# Altium PCB SX1276_e266v02a.PcbDoc
Units mm, origin at the board's own origin, x right, y up, seen from the top; angles counter-clockwise.
Board outline 65 x 36 mm, 4 copper layers (Top Layer, MidLayer1, MidLayer2, Bottom Layer), stack 1.661 mm thick; 101 components, 85 nets, 299 pads, 648 vias.
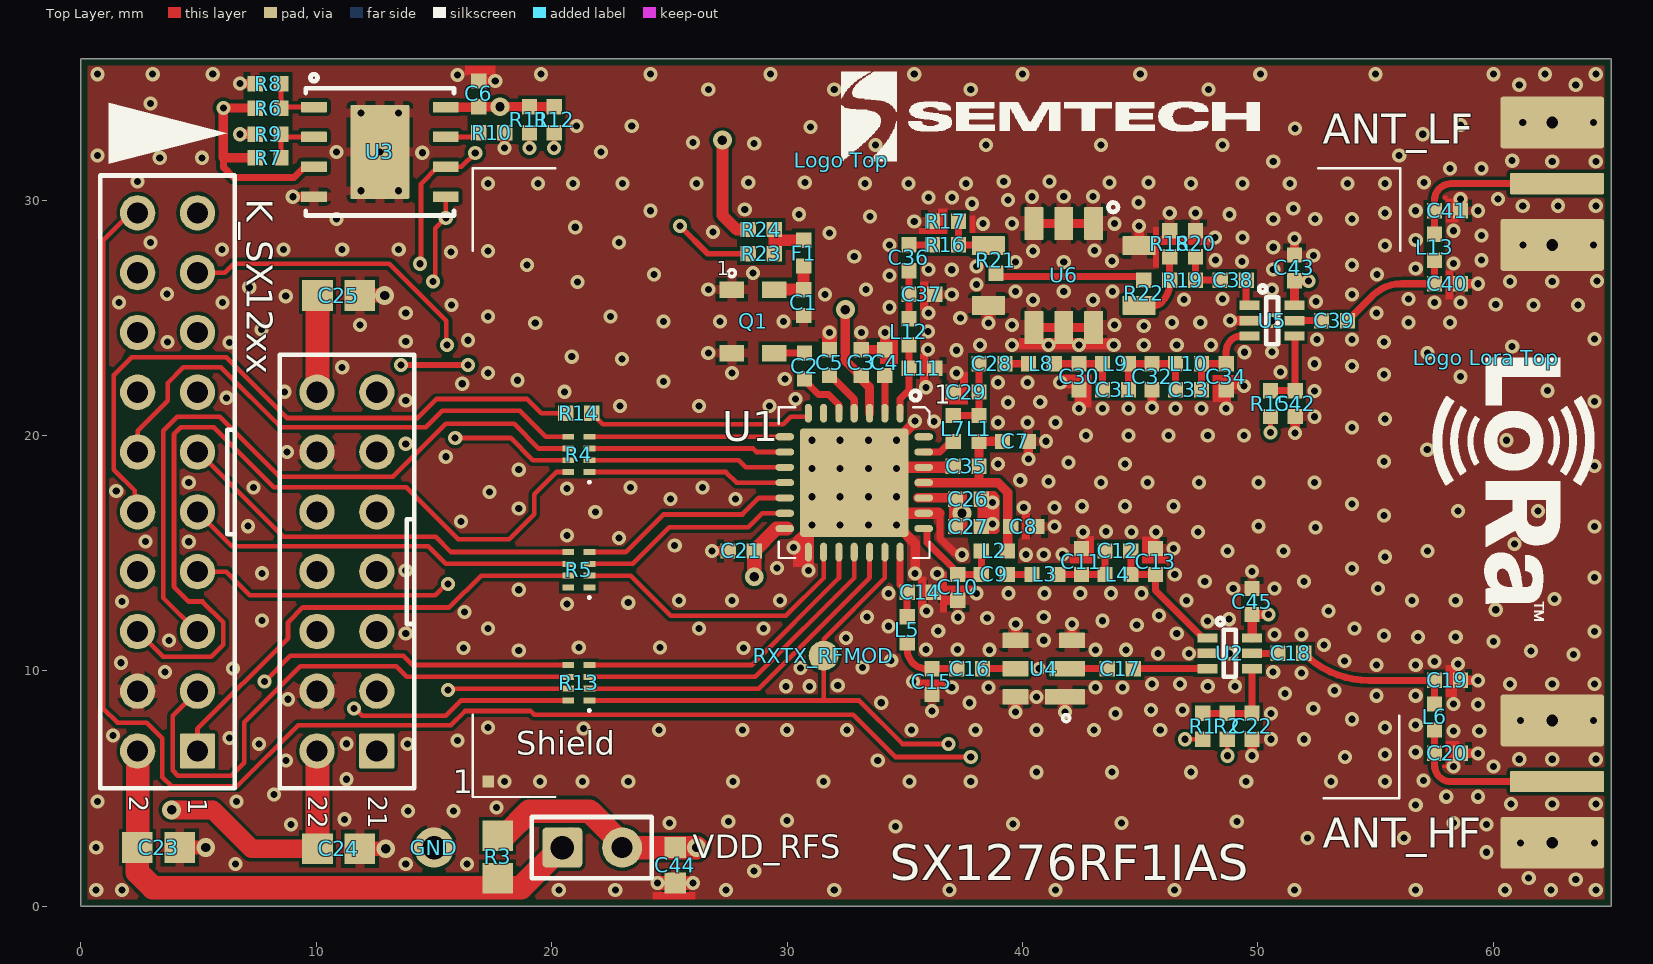
[diagram p0: Top Layer view]
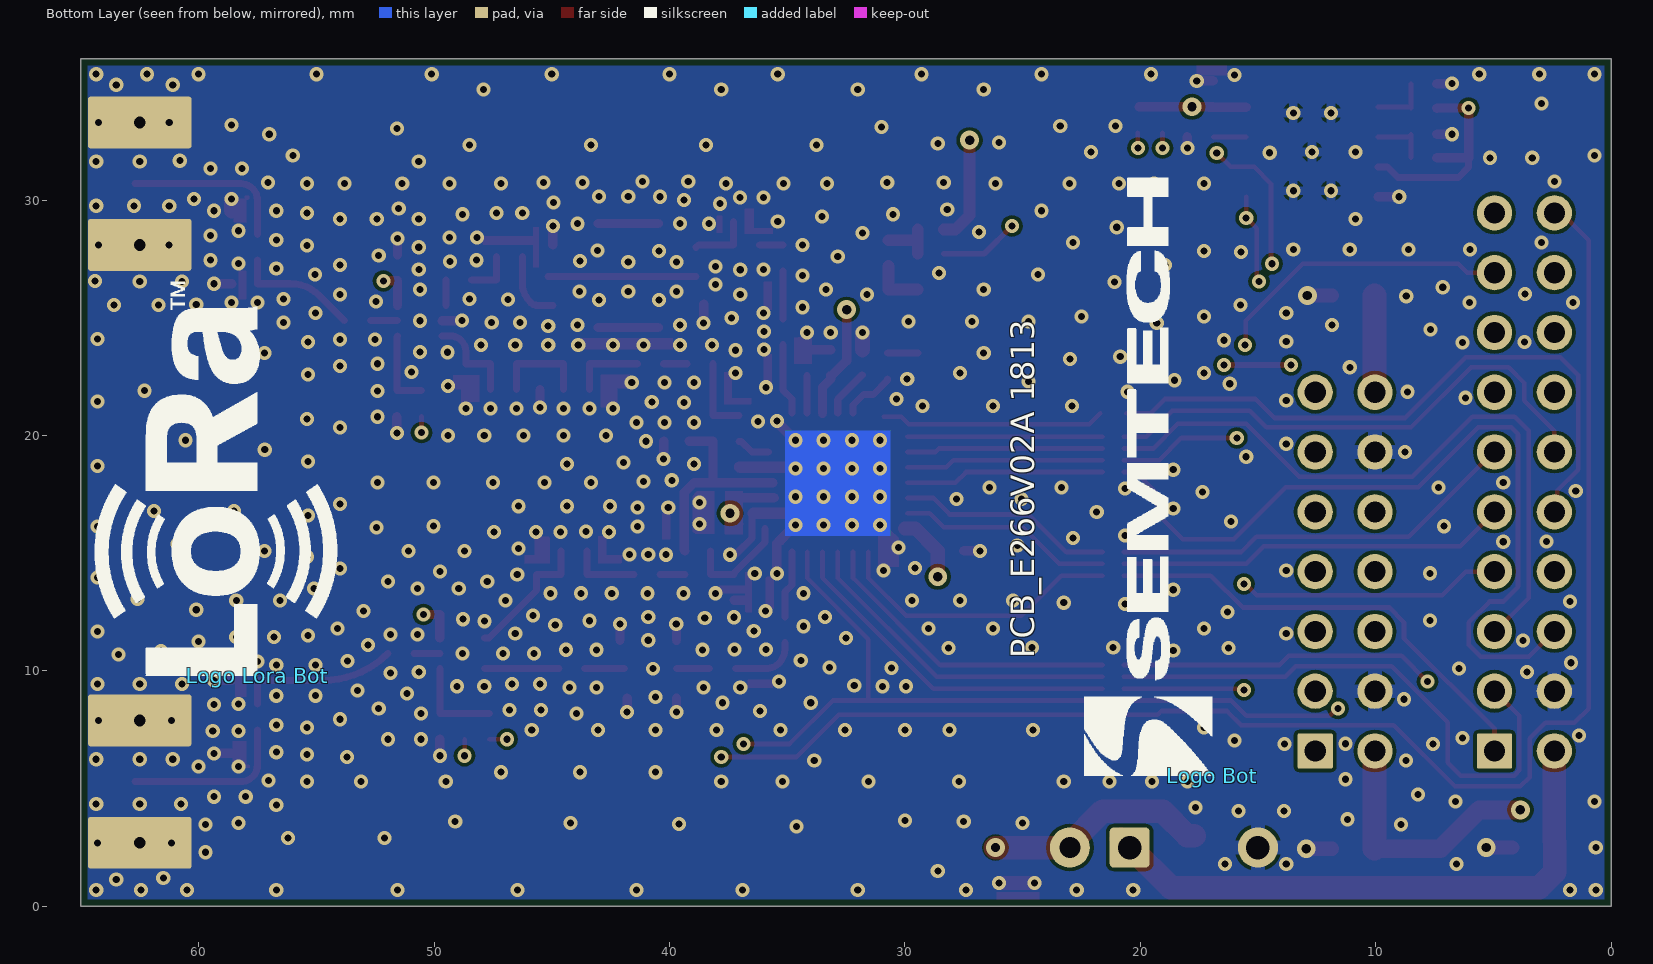
[diagram p1: Bottom Layer view, seen from below]
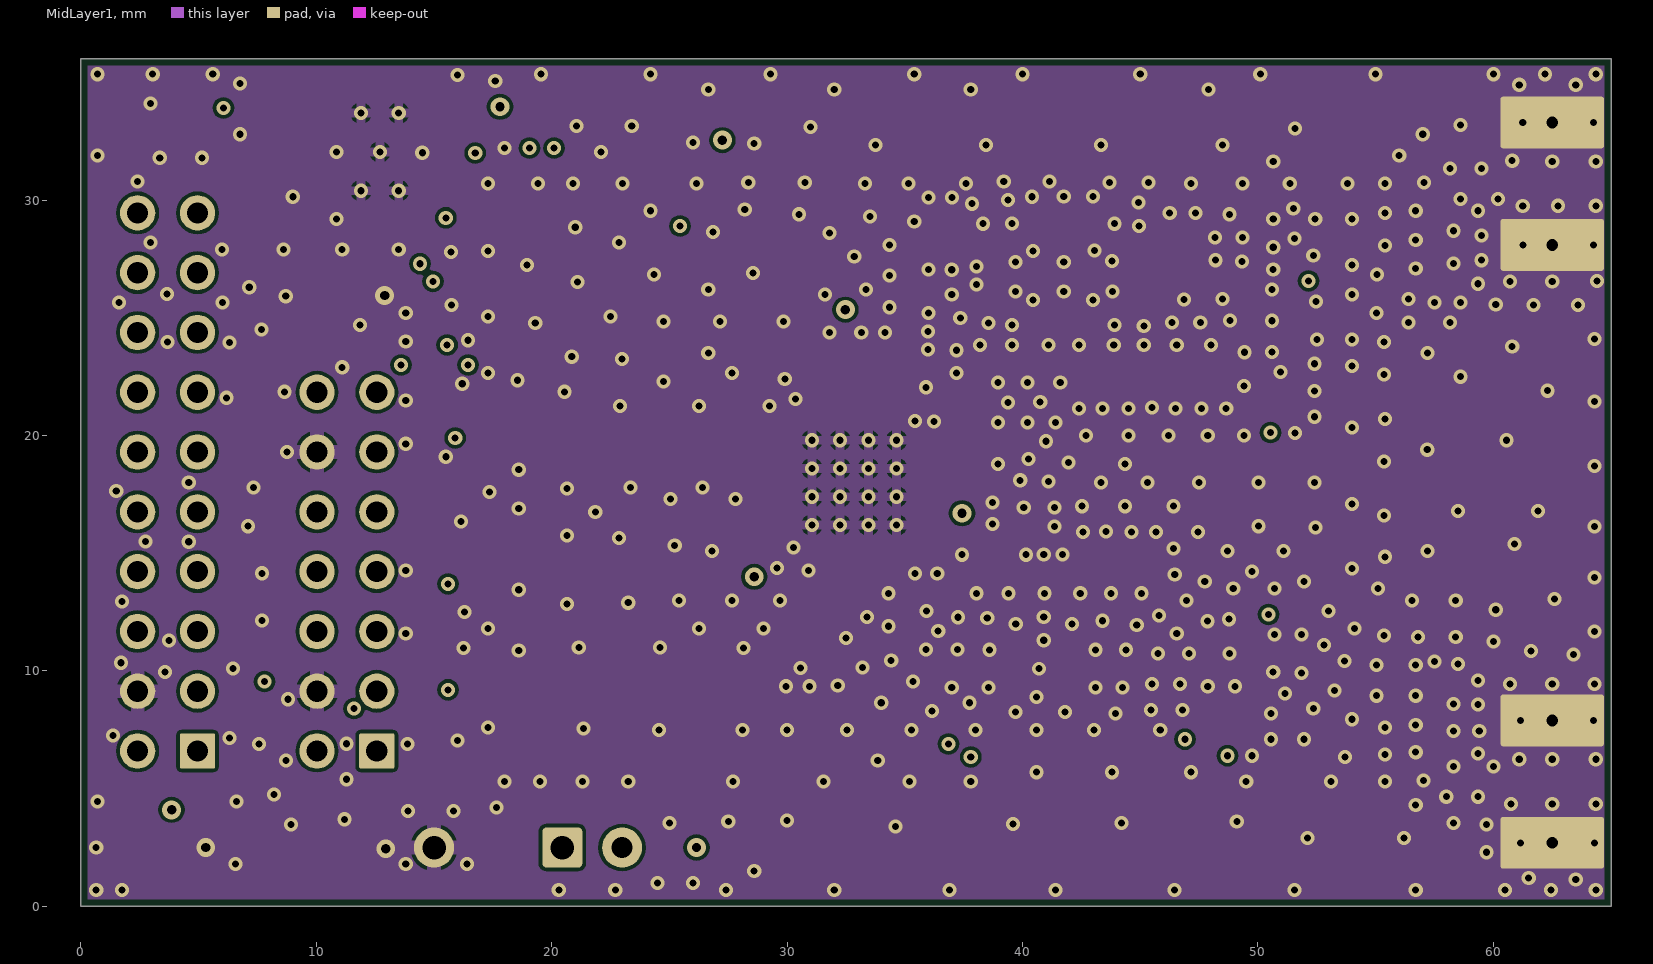
[diagram p2: MidLayer1]
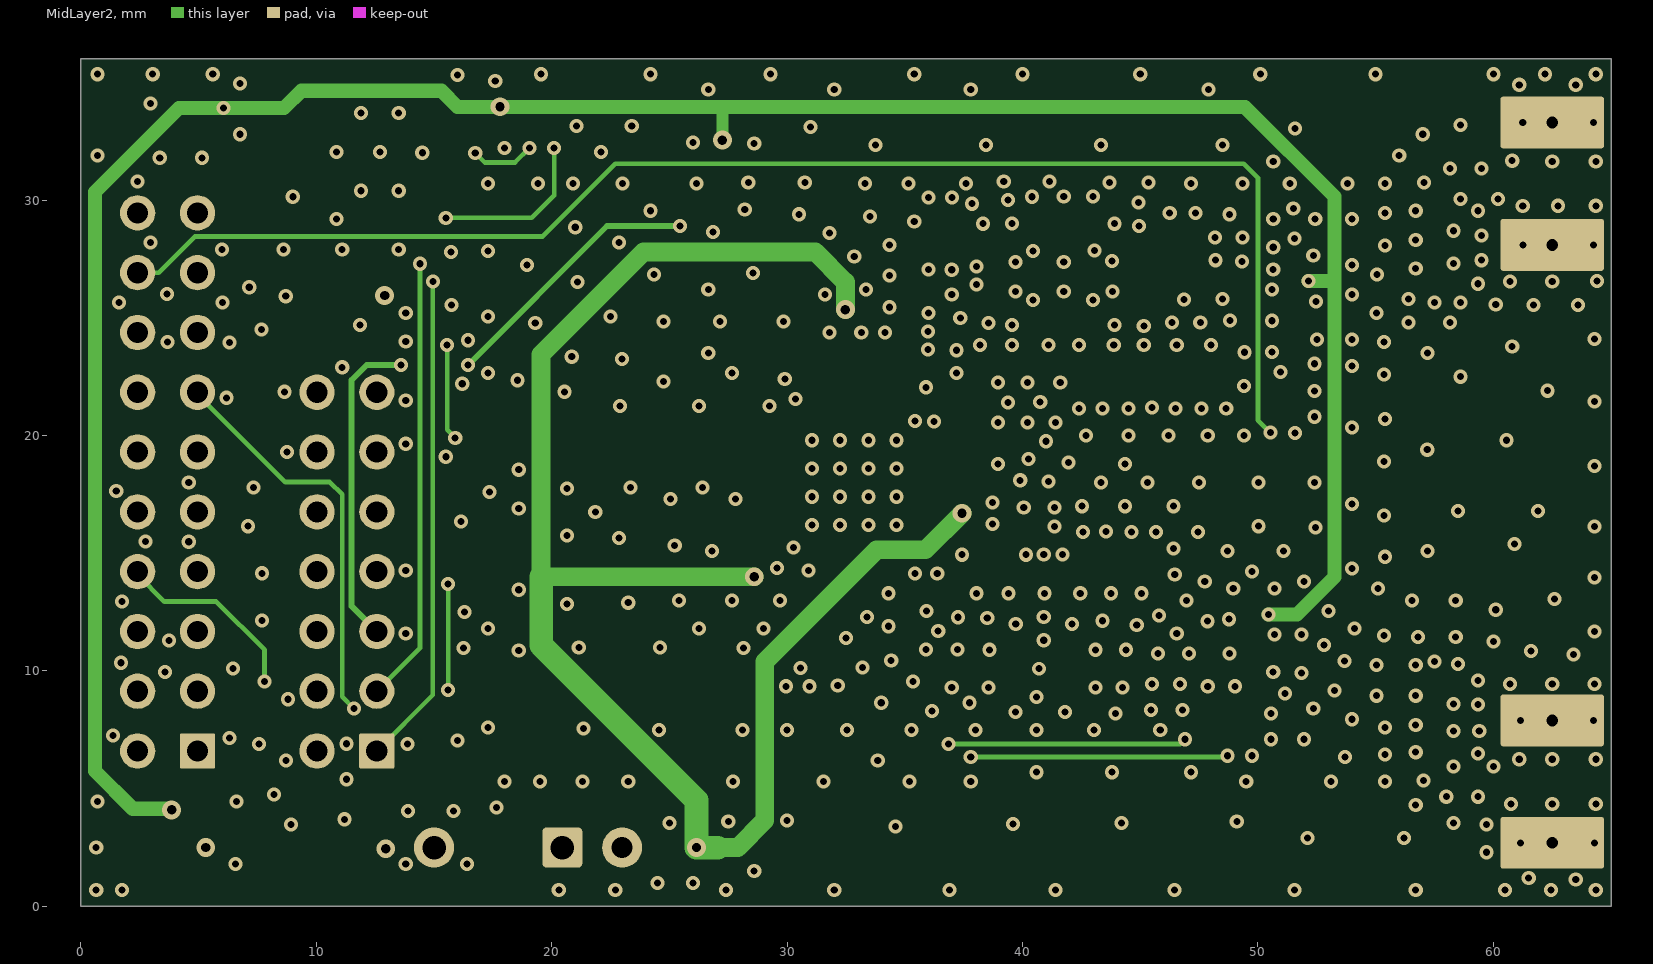
[diagram p3: MidLayer2]

## Layer stack, top to bottom
Top Layer: signal copper 0.035
Dielectric: core 0.2, FR-4, Dk 4.3
MidLayer1: signal copper 0.0356
Dielectric: prepreg 1.12, FR-4, Dk 4.3
MidLayer2: signal copper 0.0356
Dielectric: core 0.2, FR-4, Dk 4.3
Bottom Layer: signal copper 0.035

## Board outline
0,0 0,36 65,36 65,0

## Design rules (kind name [scope] priority, off if disabled: settings)
Clearance Clearance_GND [InNet('GND')] p1: gap=0.15
Clearance [All] p2: gap=0.15
ComponentClearance ComponentClearance_keepout ['SX1276_e266v02a' vs OnLayer('Mechanical 12')] p1: gap=0.25 collisioncheckmode=3 verticalgap=0.3 showdistances=FALSE
ComponentClearance [All] p2: gap=0.25 collisioncheckmode=3 verticalgap=0.3 showdistances=FALSE
HoleSize [All] p1: absolutevalues=TRUE maxlimit=3.6 minlimit=0.25 maxpercent=80.000 minpercent=20.000
HoleToHoleClearance [All] p1: gap=0.25 allowstackedmicrovias=TRUE
MinimumSolderMaskSliver [All] p1: minsoldermaskwidth=0.05
PlaneClearance [All] p1: clearance=0.2
PlaneConnect [All] p1: planeconnectstyle=Direct reliefexpansion=0.508 reliefentries=4 reliefconductorwidth=0.254 reliefairgap=0.254
PolygonConnect "PolygonConnect SAW SMD PACKAGE" [InNet('GND') vs HasFootprint('7.0X5.0MM SMD PACKAGE')   or  HasFootprint('DCC6C_3.0X3.0MM')] p1: connectstyle=Relief reliefconductorwidth=0.65 reliefentries=4 polygonreliefangle="90 Angle"
PolygonConnect "PolygonConnect SMD" [InNet('GND') vs HasFootprint('nd3225da - nd2520da') or HasFootprint('DD10_L') or HasFootprint('MSOP8')  or  HasFootprint('vqfn28_6x6mm') or HasFootprint('SOIC-SN8_L')  or HasFootprint('rlc_1206_smd capa pol') or HasFootprint('rlc_603_smd') or HasFootprint('rlc_402_smd') or HasFootprint('rlc_402_smd diode') or hasFootprint('rlc_805_smd') or HasFootprint('rlc_1210_smd')   or HasFootprint('MiniMold-6') or HasFootprint('DFN8_ 5x6mm') or HasFootprint('SC70-6') or HasFootprint('IT3200C TCXO')] p2: connectstyle=Relief reliefconductorwidth=0.4 reliefentries=4 polygonreliefangle="90 Angle"
PolygonConnect PolygonConnect_comp_diverse [InNet('GND') vs HasFootprint('CD1608-0603') or  HasFootprint('HDR34 Header') or  HasFootprint('BRIDGE_254MM') or  HasFootprint('pin_1mm') or HasFootprint('SMA_END_LAUNCH_JACK_RECEPTACLE')] p3: connectstyle=Relief reliefconductorwidth=0.6 reliefentries=4 polygonreliefangle="90 Angle"
PolygonConnect PolygonConnect_all [All] p4: connectstyle=Direct reliefconductorwidth=0.6 reliefentries=4 polygonreliefangle="90 Angle"
RoomDefinition SX1276_e266v02a [InComponentClass('SX1276_e266v02a')] p1: confinementstyle=ConfineOut formatcopy=TRUE lockcomponents=FALSE outline 73.45,41 73.45,52 83,52 83,41
RoutingVias [All] p1: holewidth=0.3 width=0.6 viastyle="Through Hole" minholewidth=0.25 minwidth=0.5 maxholewidth=0.4 maxwidth=0.8
SilkToSilkClearance [All] p1: silktosilkclearance=0.05
SilkscreenOverComponentPads [All] p1: minsilkscreentomaskgap=0.05
SolderMaskExpansion [All] p1: expansion=0.05
Width "Width GND" [InNet('GND')] p1: maxlimit=3 minlimit=0.2 preferedwidth=0.4
Width Width_VCC [InNet('VDD_RF') or  InNet('VDD_RFS') or  InNet('VCC') or  InNet('VBAT') or InNet('VSUPERCAP') or InNet('VCC_FEM')   or InNet('VCC_PA')] p2: maxlimit=2 minlimit=0.2 preferedwidth=0.8
Width "Width All" [All] p3: maxlimit=2 minlimit=0.15 preferedwidth=0.2
20 further rules are at their usual default settings.

## Components (designator, comment, footprint, x,y, rotation, side; value= is the part's Value field where it differs from the comment)
ANT_HF "SMA" "SMA END LAUNCH JACK RECEPTACLE SHORT" 62.7,5.3 r90 top locked
ANT_LF "SMA" "SMA END LAUNCH JACK RECEPTACLE SHORT" 62.7,30.7 r90 top locked
C1 "Cap" rlc_402_smd 30.7,25.65 r90 top
C2 "Cap" rlc_402_smd 30.738,22.95 r270 top
C3 "Cap" rlc_402_smd 33.15,23.1 r270 top
C4 "Cap" rlc_402_smd 34.15,23.1 r270 top
C5 "Cap" rlc_402_smd 31.8,23.1 r270 top
C6 "Cap" rlc_402_smd 16.9,34.515 r270 top
C7 "Cap" rlc_402_smd 39.7,19.75 r180 top
C8 "Cap" rlc_402_smd 40.05,16.134 r180 top
C9 "Cap" rlc_402_smd 38.8,14.1 r180 top
C10 "Cap" rlc_402_smd 37.25,13.55 r90 top
C11 "Cap" rlc_402_smd 42.5,14.65 r270 top
C12 "Cap" rlc_402_smd 44.05,15.1 r180 top
C13 "Cap" rlc_402_smd 45.65,14.65 r270 top
C14 "Cap" rlc_402_smd 35.65,13.35 r180 top
C15 "Cap" rlc_402_smd 36.15,9.55 r90 top
C16 "Cap" rlc_402_smd 37.75,10.1 r180 top
C17 "Cap" rlc_402_smd 44.15,10.1 r180 top
C18 "Cap" rlc_402_smd 51.4,10.75 r180 top
C19 "Cap" rlc_402_smd 58.05,9.6 r180 top
C20 "Cap" rlc_402_smd 58.05,6.5 r180 top
C21 "Cap" rlc_402_smd 28.05,15.1 r0 top
C22 "Cap" rlc_402_smd 49.75,7.65 r270 top
C23 "Cap" rlc_805_smd 3.299,2.5 r180 top
C24 "Cap" rlc_805_smd 10.949,2.45 r180 top
C25 "Cap" rlc_805_smd 10.949,25.95 r0 top
C26 "Cap" rlc_402_smd 37.7,17.3 r180 top
C27 "Cap" rlc_402_smd 37.7,16.134 r180 top
C28 "Cap" rlc_402_smd 38.7,23.05 r180 top
C29 "Cap" rlc_402_smd 37.6,21.85 r0 top
C30 "Cap" rlc_402_smd 42.4,22.5 r90 top
C31 "Cap" rlc_402_smd 43.95,21.95 r180 top
C32 "Cap" rlc_402_smd 45.5,22.5 r90 top
C33 "Cap" rlc_402_smd 47.05,21.95 r180 top
C34 "Cap" rlc_402_smd 48.65,22.5 r90 top
C35 "Cap" rlc_402_smd 37.6,18.7 r0 top
C36 "Cap" rlc_402_smd 35.175,27.55 r270 top
C37 "Cap" rlc_402_smd 35.725,26 r180 top
C38 "Cap" rlc_402_smd 48.95,26.6 r180 top
C39 "Cap" rlc_402_smd 53.25,24.88 r180 top
C40 "Cap" rlc_402_smd 58.05,26.45 r180 top
C41 "Cap" rlc_402_smd 58.05,29.55 r180 top
C42 "Cap" rlc_402_smd 51.58,21.356 r270 top
C43 "Cap" rlc_402_smd 51.552,27.122 r270 top
C44 "Cap Semi" rlc_603_smd 25.25,1.75 r90 top
C45 "Cap" rlc_402_smd 49.75,12.95 r270 top
F1 "Ferrite beads" rlc_402_smd 30.7,27.75 r270 top
GND "Test Pin" pin_1mm 15.5,3 r0 top
K_SX12xx "SM12xx Header" "HDR34 Header" 4.95,6.6 r90 top locked
L1 "Inductor" rlc_402_smd 38.15,20.3 r90 top
L2 "Inductor" rlc_402_smd 38.8,15.1 r0 top
L3 "Inductor" rlc_402_smd 40.95,14.1 r0 top
L4 "Inductor" rlc_402_smd 44.05,14.1 r0 top
L5 "Inductor" rlc_402_smd 35.1,11.75 r270 top
L6 "Inductor" rlc_402_smd 57.5,8.05 r270 top
L7 "Inductor" rlc_402_smd 37.05,20.3 r90 top
L8 "Inductor" rlc_402_smd 40.8,23.05 r0 top
L9 "Inductor" rlc_402_smd 43.95,23.05 r0 top
L10 "Inductor" rlc_402_smd 47.05,23.05 r0 top
L11 "Inductor" rlc_402_smd 35.725,22.858 r180 top
L12 "Inductor" rlc_402_smd 35.175,24.408 r90 top
L13 "Inductor" rlc_402_smd 57.5,28 r90 top
"Logo Bot" "Logo symbol" logo_semtech_horiz_size3 16.95,5.55 r90 bottom
"Logo Lora Bot" "Logo symbol" "Logo LoRa Size4" 57.5,9.8 r90 bottom
"Logo Lora Top" "Logo symbol" "Logo LoRa Size3" 59.7,23.3 r270 top
"Logo Top" "Logo symbol" logo_semtech_horiz_size2 32.3,31.7 r0 top
Q1 "TCXO" "IT3200C TCXO" 28.55,24.85 r270 top
R1 "Resistor" rlc_402_smd 47.65,7.65 r90 top
R2 "Resistor" rlc_402_smd 48.7,7.65 r270 top
R3 "Resistor" rlc_805_smd 17.7,2.1 r270 top
R4 "EXBN8VxxxJX" EXB28V 21.15,19.2 r90 top
R5 "EXBN8VxxxJX" EXB28V 21.15,14.3 r90 top
R6 "Resistor" rlc_402_smd 7.95,33.9 r180 top
R7 "Resistor" rlc_402_smd 7.95,31.8 r180 top
R8 "Resistor" rlc_402_smd 7.95,34.95 r0 top
R9 "Resistor" rlc_402_smd 7.95,32.8 r0 top
R10 "Resistor" rlc_402_smd 17.45,32.865 r180 top
R11 "Resistor" rlc_402_smd 19.051,33.415 r90 top
R12 "Resistor" rlc_402_smd 20.101,33.415 r90 top
R13 "EXBN8VxxxJX" EXB28V 21.15,9.5 r90 top
R14 "Resistor" rlc_402_smd 21.15,20.95 r180 top
R15 "Resistor" rlc_402_smd 50.53,21.356 r270 top
R16 "Resistor" rlc_402_smd 36.725,28.1 r180 top
R17 "Resistor" rlc_402_smd 36.725,29.1 r180 top
R18 "Resistor" rlc_402_smd 46.25,28.15 r90 top
R19 "Resistor" rlc_402_smd 46.8,26.6 r180 top
R20 "Resistor" rlc_402_smd 47.35,28.15 r90 top
R21 "Resistor" rlc_402_smd 38.87,27.45 r90 top
R22 "Resistor" rlc_402_smd 45.15,26.05 r90 top
R23 "Resistor" rlc_402_smd 28.9,27.724 r0 top
R24 "Resistor" rlc_402_smd 28.9,28.749 r180 top
RXTX_RFMOD "Test Pin" pin_SMD 31.55,10.65 r90 top
Shield "Logo symbol" "BMIS-205-F - SHIELD" 17.3,5.3 r0 top locked
U1 "SX1276" VQFN28_6X6MM 32.85,18 r270 top locked
U2 "RF Switch" SC70-6 48.8,10.75 r0 top
U3 "24AA128-I/MF" "DFN8_ 5x6mm" 12.7,32.05 r270 top locked
U4 "SAW Filter" DCC6C_3.0X3.0MM 40.9,10.1 r180 top
U5 "RF Switch" SC70-6 50.6,24.88 r0 top
U6 "SAW Filter 10p" "7.0X5.0MM SMD PACKAGE" 41.75,26.8 r180 top locked
VDD_RFS "Jumper" BRIDGE_254MM 20.45,2.5 r0 top locked

## Footprints (in the part's own frame and the unit in brackets; to place one, negate y for a bottom-side part, rotate by r counter-clockwise, add the part's x,y. Pads: shape width x height; smd on the part's side, far side on the other; paste and mask are expansions set on the pad)
"7.0X5.0MM SMD PACKAGE" [mm] "7.0x5.0mm SMD package - 10pins"
  rrect5% 0.8x1.4 smd mask+0.05: 1(-1.27,-2.21) 2(0,-2.21) 3(1.27,-2.21) 5(1.27,2.21) 7(0,2.21) 8(-1.27,2.21)
  rrect5% 1.4x0.8 smd mask+0.05: 4(3.2,-1.27) 6(3.2,1.27) 10(-3.2,-1.27) 12(-3.2,1.27)
  silkscreen extent -2.3,-3.1 -1.9,-2.7, body extent -2.4,-3.2 -1.8,-2.6, height 1.2
"BMIS-205-F - SHIELD" [mm] "BMIS-205-F EMI Gasket - Standard Surface Mount Shields -  Laird Technologies"
  rect 0.5x0.5 smd paste-1 mask+0.05: 1(0,0)
  Mechanical 15 keep-out lines w1: 0,0 0,25.4 38.1,25.4 38.1,0 0,0
  silkscreen extent -0.65,-0.7 38.75,26.05, body extent -0.3,-0.3 0.3,0.3, height 6.5
BRIDGE_254MM [mm] "Generic Bridge 2.54mm, 2 Leads 0.9mm;"
  rrect20% 1.7x1.7 hole 1 paste+0 mask+0.05: 1(0,0)
  round 1.7 hole 0.9 paste+0 mask+0.05: 2(2.54,0)
  silkscreen extent -1.3,-1.3 3.8,1.3, body extent -1.4,-1.4 3.9,1.4, height 1
DCC6C_3.0X3.0MM [mm] "DCC6C footprint, 3.0x3.0mm"
  rrect5% 1.7x0.65 smd mask+0.05: 1(-0.9,1.2)
  rrect5% 1.5x0.65 smd mask+0.05: 2(-1,0)
  rrect5% 1.1x0.65 smd mask+0.05: 3(-1.2,-1.2) 4(1.2,-1.2) 5(1.2,0) 6(1.2,1.2)
  silkscreen extent -1.1,1.95 -0.8,2.25, body extent -1.5,-1.5 1.5,1.5, height 1
"DFN8_ 5x6mm" [mm] "8 Leads, Body 5x6mm, pitch 1.27mm, DFN8"
  rrect10% 0.45x1.1 smd paste+0 mask+0.05: 1(-1.905,-2.8) 2(-0.635,-2.8) 3(0.635,-2.8) 4(1.905,-2.8) 5(1.905,2.8) 6(0.635,2.8) 7(-0.635,2.8) 8(-1.905,2.8)
  rrect5% 4x2.5 smd paste+0 mask+0.05: 9(0,0)
  silkscreen extent -3.3,-3.15 2.7,3.15, body extent -2.5,-3 2.5,3, height 12
EXB28V [mm] "Chip Resistor Array, (0402x4); SM; 8 Leads; Body 2.10 x 1.10 mm (LxW max)"
  rect 0.25x0.5 smd: 1(-0.75,-0.45) 2(-0.25,-0.45) 3(0.25,-0.45) 4(0.75,-0.45) 5(0.75,0.45) 6(0.25,0.45) 7(-0.25,0.45) 8(-0.75,0.45)
  silkscreen extent -1.23,-0.5 -1.13,-0.4
"HDR34 Header" [mm] "Connector; Header; 34 Position - SM12xx Header"
  rrect10% 1.5x1.5 hole 0.9 mask+0.05: 1(0,0) 21(0,-7.62)
  round 1.5 hole 0.9 mask+0.05: 2(0,2.54) 3(2.54,0) 4(2.54,2.54) 5(5.08,0) 6(5.08,2.54) 7(7.62,0) 8(7.62,2.54) 9(10.16,0) 10(10.16,2.54) 11(12.7,0) 12(12.7,2.54) 13(15.24,0) 14(15.24,2.54) 15(17.78,0) 16(17.78,2.54) 17(20.32,0) 18(20.32,2.54) 19(22.86,0) 20(22.86,2.54) 22(0,-5.08) 23(2.54,-7.62) 24(2.54,-5.08) 25(5.08,-7.62) 26(5.08,-5.08) 27(7.62,-7.62) 28(7.62,-5.08) 29(10.16,-7.62) 30(10.16,-5.08) 31(12.7,-7.62) 32(12.7,-5.08) 33(15.24,-7.62) 34(15.24,-5.08)
  silkscreen extent -1.59,-9.21 27.53,4.13, body extent -1.59,-9.21 24.45,4.13
"IT3200C TCXO" [mm] "SMD 3.2x2.5mm for IT3200C TCXO"
  rect 0.7x1.05 smd mask+0.05: 1(-1.35,-0.9) 2(1.35,-0.9) 3(1.35,0.9) 4(-1.35,0.9)
  silkscreen extent -2.2,-1.05 -1.9,-0.75, body extent -1.6,-1.25 1.6,1.25, height 1
"Logo LoRa Size3" [mm] "Logo LoRa Size3 - Top Overlay"
  silkscreen extent 0,-2.26 11.16,4.59
"Logo LoRa Size4" [mm] "Logo LoRa Size4 - Top Overlay"
  silkscreen extent 0,-3.38 16.73,6.89, body extent -0.01,-3.39 16.74,6.9
logo_semtech_horiz_size2 [mm] "Logo semtech horizontal - size2 - M"
  silkscreen extent 0,-0.03 17.78,3.76, body extent 0,0 0.08,0, height 6
logo_semtech_horiz_size3 [mm] "Logo semtech horizontal - size3 - L"
  silkscreen extent 0,0 25.4,5.41, body extent -0.01,-0.01 25.41,5.42
pin_1mm [mm] "Generic Pin 1.1mm; 1 Lead"
  round 1.7 hole 1 paste+0 mask+0.05: 1(-0.5,-0.5)
pin_SMD [mm] "Generic Pin; 1 pin SMD"
  round 1.27 smd paste-1 mask+0.05: 1(0,0)
rlc_402_smd [mm] "Chip SMD component 402; Body 1.0 x 0.5 mm (LxW typ)"
  rect 0.65x0.65 smd mask+0.05: 1(-0.55,0) 2(0.55,0)
rlc_603_smd [mm] "Chip SMD component 603; Body 1.6 x 0.8mm (LxW typ)"
  rect 0.9x0.9 smd paste+0 mask+0.05: 1(-0.75,0) 2(0.75,0)
rlc_805_smd [mm] "Chip SMD component 805; Body 2.0 x 1.25 mm (LxW typ)"
  rect 1.3x1.3 smd mask+0.05: 1(-0.9,0) 2(0.9,0)
SC70-6 [mm] "SC70 6-Leads, Body 2.0x1.25mm, Pitch 0.65mm"
  rect 0.85x0.4 smd mask+0.05: 1(-0.95,0.65) 2(-0.95,0) 3(-0.95,-0.65) 4(0.95,-0.65) 5(0.95,0) 6(0.95,0.65)
  silkscreen extent -0.55,-1 0.25,1.5, body extent -0.63,-1 0.63,1, height 1.45
"SMA END LAUNCH JACK RECEPTACLE SHORT" [mm] "SMA Connector - End Launch Jack Receptacle - Short"
  rrect10% 0.9x4 smd paste+0 mask+0.05: 1(0,0)
  rrect10% 2.2x4.4 hole 0.5 mask+0.05: 2(-2.6,0.2) 2(2.6,0.2)
  body extent -0.5,-2.05 0.5,2.05, height 8
VQFN28_6X6MM [mm] "28 Leads, Body 6.0x6.0mm, Pitch 0.65mm, VQFN28"
  oval 0.8x0.3 smd mask+0.05: 1(-2.95,1.95) 2(-2.95,1.3) 3(-2.95,0.65) 4(-2.95,0) 5(-2.95,-0.65) 6(-2.95,-1.3) 7(-2.95,-1.95) 15(2.95,-1.95) 16(2.95,-1.3) 17(2.95,-0.65) 18(2.95,0) 19(2.95,0.65) 20(2.95,1.3) 21(2.95,1.95)
  oval 0.3x0.8 smd mask+0.05: 8(-1.95,-2.95) 9(-1.3,-2.95) 10(-0.65,-2.95) 11(0,-2.95) 12(0.65,-2.95) 13(1.3,-2.95) 14(1.95,-2.95) 22(1.95,2.95) 23(1.3,2.95) 24(0.65,2.95) 25(0,2.95) 26(-0.65,2.95) 27(-1.3,2.95) 28(-1.95,2.95)
  rrect5% 4.6x4.6 smd paste-3.3 mask+0.05: 29(0,0)
  Mechanical 15 keep-out lines w0.1: 3.5,-3.5 -3.5,-3.5 -3.5,3.5 3.5,3.5 3.5,-3.5
  silkscreen extent -3.9,-3.2 3.2,3.2, body extent -3,-3 3,3, height 1

## Part data
ANT_HF ANT_LF: "SMA Straight Connector"
C1 C2 C3 C4 C5 C6 C7 C8 C9 C10 C11 C12 C13 C14 C15 C16 C17 C18 C19 C20 C21 C22 C23 C24 C25 C26 C27 C28 C29 C30 C31 C32 C33 C34 C35 C36 C37 C38 C39 C40 C41 C42 C43 C45: "Capacitor SMD"
C44: "Capacitor (Semiconductor SIM Model)"
GND RXTX_RFMOD: library part test_pin
K_SX12xx: "SM12xx Header; 34pins: 2x10pins + 2x7pins"
L1 L2 L3 L4 L5 L6 L7 L8 L9 L10 L11 L12 L13: "Inductor SMD"
"Logo Bot" "Logo Lora Bot" "Logo Lora Top" "Logo Top": library part Logo, "Schematic symbol for Logo"
R1 R2 R3 R6 R7 R8 R9 R10 R11 R12 R14 R15 R16 R17 R18 R19 R20 R21 R22 R23 R24: "Resistor SMD - IEC symbol version"
R4 R5 R13: "Mini-Flat Package, Isolated Resistor Network, 0.031 W/resistor"
Shield: library part Shield, "Shield - EMI Gasket - Standard Surface Mount Shields"
U1: "SX1276 - Low Power Integrated UHF Transceiver with loRa Modem"
U2 U5: library part "PE4259 RF Switch", "PE4259 Peregrine RF Switch"
U3: "128kbit, 400kHz, 1.7V, 8-Pin DFN, Industrial Temperature"
U4: "SAW Filter - Bandpass - TEMEX type"
U6: "SAW Filter 10p  - Bandpass - RFM type"
VDD_RFS: "Jumper Wire"

## Via types
v1: diameter 0.6, hole 0.3, Top Layer to Bottom Layer, tented both sides, 616 vias
v2: diameter 0.6, hole 0.3, Top Layer to Bottom Layer, tented top, 21 vias
v3: diameter 0.8, hole 0.4, Top Layer to Bottom Layer, tented both sides, 10 vias
v4: diameter 0.58, hole 0.3, Top Layer to Bottom Layer, tented both sides, 1 vias

## Nets (pads, with @x,y where several pads share a name; then routed paths per layer and width w, separated by ;. In a path a pad name is that pad's centre, name@x,y a point inside that pad or via, vN(x,y) a via of type N, cw(c..) or ccw(c..) an arc to the next point about the centre after c; other vN are vias at no path point)
DIO0: K_SX12xx.12 R4.5 | length 22.6
  Top Layer w0.2: K_SX12xx.12 2.41,20.21 3.683,21.483 3.683,22.233 4.35,22.9 5.95,22.9 8.5,20.35 14.65,20.35 15.35,21.05 18.65,21.05 19.75,19.95 R4.5
DIO0_SX: R4.4 U1.8 | length 8.3
  Top Layer w0.2: R4.4 U1.8
DIO1: K_SX12xx.5 R4.6 | length 29
  Top Layer w0.2: K_SX12xx.5 4.92,11.68 3.5,13.1 3.5,20.2 4.1,20.8 5.9,20.8 8.45,18.25 13.256,18.25 15.506,20.5 18.4,20.5 19.45,19.45 R4.6
DIO1_SX: R4.3 U1.9 | length 8.4
  Top Layer w0.2: R4.3 28.55,19.45 28.7,19.3 U1.9
DIO2: K_SX12xx.17 R4.7 | length 22.1
  Top Layer w0.2: K_SX12xx.17 6.12,26.92 6.5,27.3 13.1,27.3 15.524,24.876 15.524,23.885 v1(15.559,23.85) ; v1(15.9,19.9) 18.25,19.9 19.2,18.95 R4.7
  MidLayer2 w0.2: v1(15.559,23.85) 15.559,20.241 v1(15.9,19.9)
DIO2_SX: R4.2 U1.10 | length 8.4
  Top Layer w0.2: R4.2 27.95,18.95 28.25,18.65 U1.10
DIO3: K_SX12xx.6 R4.8 | length 35
  Top Layer w0.2: K_SX12xx.6 3.49,10.6 5.54,10.6 6.045,11.105 6.045,12.068 5.163,12.95 4.58,12.95 3.95,13.58 3.95,20.06 4.24,20.35 5.65,20.35 8.2,17.8 13.821,17.8 16.019,15.601 18.201,15.601 19.26,16.66 19.26,17.51 20.2,18.45 R4.8
DIO3_SX: R4.1 U1.11 | length 8.5
  Top Layer w0.2: R4.1 27.4,18.45 27.85,18 U1.11
DIO4: K_SX12xx.11 R5.5 | length 17.5
  Top Layer w0.2: K_SX12xx.11 5,19.3 8.6,15.7 15.071,15.7 15.721,15.05 R5.5
DIO4_SX: R5.4 U1.12 | length 9.3
  Top Layer w0.2: R5.4 23.15,15.05 24.75,16.65 28.1,16.65 28.8,17.35 U1.12
DIO5: K_SX12xx.9 R5.6 | length 16.7
  Top Layer w0.2: K_SX12xx.9 6.41,15.3 14.75,15.3 15.5,14.55 R5.6
DIO5_SX: R5.3 U1.13 | length 9.2
  Top Layer w0.2: R5.3 23.45,14.55 25,16.1 28.35,16.1 28.95,16.7 U1.13
FEM_ANT_SEL: K_SX12xx.16
FEM_CPS: K_SX12xx.18 R15.2 | length 61.5
  Top Layer w0.2: v1(50.53,20.126) R15.2
  MidLayer2 w0.2: K_SX12xx.18 3.31,26.92 4.85,28.46 19.61,28.46 22.7,31.55 49.4,31.55 50,30.95 50,20.656 v1(50.53,20.126)
FEM_CSD: K_SX12xx.19
FEM_CTX: K_SX12xx.20 R2.2 | length 74.8
  Top Layer w0.2: K_SX12xx.20 2.11,29.46 0.95,28.3 0.95,8.405 1.555,7.8 2.8,7.8 3.458,7.142 3.458,5.492 3.85,5.1 6.63,5.1 9.23,7.7 15.719,7.7 16.319,8.3 19.1,8.3 19.26,8.14 32.81,8.14 34.6,6.35 v1(37.8,6.35) ; v1(48.7,6.4) R2.2
  MidLayer2 w0.2: v1(37.8,6.35) 48.65,6.35 v1(48.7,6.4)
FEM_SPARE: K_SX12xx.14
GND: ANT_HF.2 ANT_LF.2 C1.1 C3.1 C4.1 C5.1 C6.1 C7.1 C8.1 C10.1 C11.1 C13.1 C14.1 C15.1 C19.1 C20.1 C21.1 C22.2 C23.1 C24.1 C25.2 C26.1 C27.1 C29.1 C30.1 C32.1 C34.1 C35.1 C37.1 C40.1 C41.1 C42.2 C43.1 C44.1 C45.1 GND.1 K_SX12xx.4 K_SX12xx.24 K_SX12xx.32 L11.1 Q1.1 Q1.2 R8.1 R9.1 R10.1 R17.2 R18.2 R20.2 Shield.1 U1.15 U1.23 U1.26 U1.29 U2.2 U3.4 U3.9 U4.1 U4.3 U4.4 U4.6 U5.2 U6.1 U6.2 U6.3 U6.5 U6.6 U6.7 U6.8 U6.10 | length 52.7
  Top Layer w0.3: v2(31.05,19.8) v2(32.25,18.6) U1.29 ; 36.5,16.684 36.5,15.641 37.141,15 v1@37.355,15 ; C27.1 v1@38.714,16.134 ; C26.1 38.675,17.3 v1@38.725,17.25
  Top Layer w0.4: v1(6.75,32.8) R9.1 ; v1(6.75,34.95) R8.1 ; v1(9,30.145) U3.4 ; C6.1 v1(17.6,35.065) ; v1(18,32.215) R10.1@18,32.689 ; v1(26.8,15.1) C21.1 ; U1.29@31.124,16.134 v2(32.25,17.4) U1.29 ; C3.1 C4.1 ; v2(34.65,19.8) v2(33.45,18.6) U1.29 ; v1(35.435,14.144) 35.435,15.415 v2(34.65,16.2) v2(33.45,17.4) U1.29 ; 36.725,13 C10.1 ; C35.1@37,18.65 C35.1 ; v1(38.55,24.775) U6.6 U6.6@38.55,25.571 ; v1@39.7,8.151 v1@39.7,8.201 ; U4.6@39.7,8.85 v1(39.7,8.25) v1@39.7,8.201 ; U4.4 v1@39.7,12.1 ; v1@39.711,8.19 v1@39.7,8.201 ; v1@40.25,19.05 C7.1 ; U6.5 U6.7 U6.8 ; U6.3 U6.2 U6.1 ; v1@41.8,8.14 v1(41.8,8.25) U4.1@41.8,8.85 ; U4.3 v1(42.1,12) ; v1(42.4,21.15) C30.1 ; U6.10@44.95,28.111 v1(44.95,28.9) ; v1(45.5,21.2) C32.1 ; v1(48.65,21.15) C34.1 ; v1(48.81,24.89) 48.82,24.88 U5.2 ; v1(49.75,6.4) C22.2 ; C43.1 v1(51.552,28.371) ; v1(51.58,20.106) C42.2 ; C20.1 v1(59.35,6.5) ; C19.1 v1(59.35,9.6) ; C40.1 v1(59.35,26.45)
  Top Layer w0.5: v1(30.9,14.276) U1.15 U1.29@30.9,16.05 ; U1.29@33.517,18.65 U1.26 C35.1@37,18.65 ; U1.29@34.15,16.7 U1.23 36.43,16.7
  Top Layer w0.6: C23.1 v3(5.3,2.5) ; C24.1 v3(12.95,2.45) ; C25.2 v3(12.9,25.95) ; v1(24.5,1) C44.1 v1(26,1)
  Top Layer w0.65: C5.1 v1(31.8,24.38) ; C41.1 v1(58.6,30.05)
  other v1: 0.65,0.7 1.744,0.7 20.3,0.7 22.7,0.7 27.4,0.7 32,0.7 36.9,0.7 41.4,0.7 46.45,0.7 51.55,0.7 56.7,0.7 60.5,0.7 62.45,0.7 64.35,0.7 63.5,1.15 61.5,1.2 28.6,1.5 6.574,1.8 13.798,1.8 16.4,1.8 59.7,2.3 0.65,2.5 61.15,2.692 64.3,2.685 52.1,2.9 56.2,2.9 34.6,3.4 8.929,3.481 59.7,3.481 39.6,3.5 25,3.55 44.2,3.55 58.3,3.55 27.5,3.6 49.1,3.6 30,3.65 11.2,3.7 13.89,4.05 15.821,4.05 17.65,4.2 56.7,4.3 60.745,4.35 62.5,4.35 64.35,4.35 0.7,4.45 6.606,4.45 58,4.659 59.35,4.659 8.2,4.75 18,5.3 19.5,5.3 21.3,5.3 23.25,5.3 27.7,5.3 31.55,5.3 35.2,5.3 37.8,5.3 49.5,5.3 53.1,5.3 55.402,5.3 57.025,5.35 11.279,5.4 40.6,5.7 43.8,5.7 47.15,5.7 58.3,5.935 60,5.95 8.714,6.2 33.85,6.2 61.1,6.25 62.5,6.25 64.35,6.25 53.7,6.35 55.402,6.45 56.7,6.55 7.567,6.9 11.28,6.908 13.88,6.9 16,7.05 50.55,7.1 51.95,7.1 6.31,7.15 1.367,7.259 58.3,7.443 59.4,7.445 24.55,7.5 28.1,7.5 30,7.5 32.55,7.5 35.284,7.5 38,7.5 40.6,7.5 43.029,7.5 45.85,7.5 21.35,7.55 17.3,7.6 55.402,7.6 56.7,7.7 61.15,7.9 64.25,7.9 54,7.95 43.95,8.2 50.55,8.2 36.15,8.3 45.45,8.35 46.8,8.35 52.35,8.405 59.35,8.583 58.3,8.6 33.997,8.65 37.75,8.65 8.8,8.8 40.6,8.9 55.031,8.95 56.7,8.95 51.15,9.05 53.25,9.167 36.993,9.3 38.55,9.3 43.1,9.3 44.25,9.3 29.95,9.35 30.95,9.35 47.868,9.35 49.025,9.35 32.15,9.378 45.5,9.45 46.696,9.45 60.7,9.45 62.5,9.45 64.3,9.45 35.35,9.55 51.85,9.921 3.573,9.95 50.647,9.95 6.461,10.1 30.565,10.124 33.2,10.15 55.031,10.25 56.7,10.25 58.5,10.3 1.7,10.35 57.5,10.4 53.674,10.428 34.42,10.45 63.4,10.7 45.75,10.75 47.063,10.75 48.795,10.75 61.6,10.85 18.6,10.876 38.6,10.9 43.1,10.9 44.4,10.9 35.9,10.915 37.243,10.905 16.25,10.97 28.15,10.97 21.15,11 24.6,10.999 52.8,11.1 60,11.25 3.74,11.3 40.9,11.306 32.5,11.4 56.8,11.45 58.4,11.45 55.35,11.5 50.7,11.55 51.85,11.55 13.798,11.6 46.55,11.6 64.3,11.68 36.417,11.7 17.286,11.8 26.25,11.8 29,11.8 54.1,11.8 34.3,11.9 44.85,11.95 39.711,12 47.858,12.115 43.4,12.133 7.7,12.15 48.769,12.2 38.5,12.25 33.4,12.287 37.25,12.283 40.9,12.3 45.803,12.35 16.3,12.5 35.915,12.55 53,12.55 60.1,12.6 20.65,12.85 23.25,12.9 1.75,12.95 25.4,13 27.65,13 29.7,13 46.96,13 56.55,13 58.4,13 62.6,13.05 34.3,13.3 38.05,13.3 39.403,13.3 40.926,13.3 42.45,13.3 43.75,13.3 45.05,13.3 18.6,13.45 48.95,13.5 50.7,13.5 55.1,13.5 47.739,13.8 51.95,13.8 64.3,13.965 46.464,14.1 7.7,14.15 36.375,14.144 49.75,14.22 13.798,14.276 54,14.35 29.57,14.37 55.4,14.85 37.428,14.94 40.15,14.94 40.901,14.95 41.7,14.95 48.7,15.1 51.077,15.1 57.2,15.1 46.419,15.2 30.274,15.25 25.223,15.325 60.9,15.4 4.58,15.49 2.75,15.505 22.85,15.65 20.65,15.75 42.574,15.9 44.625,15.9 45.662,15.9 47.45,15.9 43.55,15.917 52.45,16.1 41.35,16.134 64.3,16.134 7.1,16.15 50.025,16.15 38.725,16.25 16.15,16.35 55.35,16.6 21.85,16.75 58.5,16.8 61.9,16.8 18.6,16.9 40.05,16.95 41.35,16.95 42.517,17 44.35,17 46.419,17 54,17.1 38.725,17.15 25.05,17.3 27.8,17.3 17.35,17.6 1.502,17.65 20.65,17.75 7.326,17.8 23.35,17.8 26.4,17.8 4.58,18 43.34,18 45.3,18 47.5,18 50.025,18 52.4,18 41.1,18.055 39.9,18.1 18.6,18.55 64.3,18.7 38.95,18.8 44.35,18.8 41.95,18.85 55.35,18.9 40.25,19 15.5,19.1 8.75,19.3 57.191,19.4 13.798,19.65 41,19.76 60.554,19.8 42.7,20 44.5,20 46.2,20 47.868,20 49.4,20 54,20.35 38.95,20.55 40.209,20.55 41.4,20.55 36.233,20.6 35.435,20.622 55.402,20.7 52.4,20.8 43.4,21.15 44.5,21.15 46.5,21.15 47.6,21.15 22.9,21.25 26.25,21.25 29.25,21.25 39.376,21.409 40.75,21.425 64.3,21.45 13.798,21.483 30.35,21.55 6.178,21.605 8.65,21.859 20.55,21.859 52.4,21.9 62.3,21.906 35.9,22.05 49.4,22.11 16.2,22.2 38.95,22.25 40.209,22.25 41.6,22.25 24.75,22.296 18.55,22.35 29.9,22.405 58.6,22.5 55.35,22.6 17.286,22.65 27.657,22.65 37.2,22.658 50.95,22.7 11.1,22.9 54,22.95 52.4,23.05 22.99,23.25 20.85,23.35 26.65,23.501 57.201,23.501 49.43,23.54 50.6,23.55 37.2,23.623 35.989,23.65 60.8,23.78 38.2,23.85 39.55,23.85 41.1,23.85 42.4,23.85 43.875,23.85 45.15,23.85 46.55,23.85 48,23.85 6.31,23.95 3.683,23.975 55.35,23.975 13.798,24 16.45,24.05 52.5,24.077 54,24.077 64.3,24.1 33.15,24.38 34.15,24.38 35.989,24.425 7.666,24.5 45.15,24.65 11.861,24.7 39.55,24.7 43.9,24.7 19.3,24.775 46.35,24.8 47.55,24.8 56.4,24.8 58.15,24.8 24.75,24.85 27.15,24.85 29.85,24.85 50.6,24.876 37.355,25 17.3,25.05 22.5,25.05 55.031,25.2 13.798,25.206 36,25.206 34.342,25.45 15.75,25.55 61.7,25.55 63.6,25.55 60.1,25.571 1.625,25.65 6.014,25.65 57.5,25.65 58.6,25.65 52.471,25.7 40.45,25.751 43,25.751 46.863,25.783 48.5,25.799 56.4,25.801 8.7,25.92 3.652,26.012 31.6,26 36.993,26 54,26 39.7,26.118 41.75,26.125 43.815,26.118 26.65,26.203 33.35,26.199 50.6,26.203 7.15,26.3 38.05,26.425 21.1,26.523 60.7,26.55 62.5,26.55 64.4,26.57 34.35,26.8 24.35,26.85 55.05,26.85 28.55,26.9 36,27.053 36.993,27.045 50.647,27.053 56.7,27.1 38.05,27.183 18.95,27.25 54,27.25 58.3,27.315 39.7,27.375 41.75,27.375 43.8,27.408 49.328,27.4 48.2,27.45 59.5,27.45 32.85,27.6 52.35,27.65 15.719,27.8 17.3,27.841 40.45,27.841 43.05,27.867 6,27.9 8.6,27.9 11.1,27.9 13.5,27.9 50.65,28 55.402,28.07 34.342,28.1 61.261,28.1 64.25,28.1 2.95,28.194 22.85,28.2 56.7,28.305 48.176,28.422 49.338,28.422 59.5,28.5 31.8,28.6 26.85,28.65 58.3,28.7 21,28.85 38.321,29 39.55,29.01 43.9,29 35.4,29.1 10.851,29.2 50.65,29.2 52.431,29.2 54,29.2 33.517,29.3 30.5,29.4 48.795,29.4 46.25,29.45 47.35,29.45 55.4,29.45 24.2,29.55 56.7,29.55 59.35,29.55 28.2,29.6 51.5,29.65 61.247,29.75 62.75,29.761 64.35,29.761 37.85,29.85 44.925,29.9 39.387,30 60.2,30.05 36,30.113 37,30.113 40.4,30.145 41.75,30.15 43,30.15 17.3,30.7 19.423,30.7 20.9,30.7 23,30.7 26.15,30.7 33.3,30.7 35.15,30.7 37.6,30.7 47.15,30.7 49.35,30.7 51.352,30.7 53.8,30.7 55.402,30.7 28.35,30.75 30.75,30.75 43.7,30.75 45.35,30.75 57.05,30.75 2.4,30.793 39.2,30.793 41.15,30.793 58.15,31.35 59.5,31.35 50.65,31.65 62.5,31.65 64.35,31.65 60.8,31.676 3.35,31.8 5.15,31.8 0.7,31.9 56,31.9 14.501,32.015 10.851,32.05 22.1,32.05 33.75,32.35 38.45,32.35 43.34,32.35 48.5,32.35 28.6,32.4 26,32.45 57,32.8 51.58,33.05 30.995,33.1 21.05,33.15 23.4,33.15 58.6,33.2 61.247,33.3 64.25,33.3 2.95,34.1 26.65,34.7 32,34.7 37.8,34.7 47.9,34.7 61.1,34.9 63.5,34.9 16.001,35.315 0.7,35.35 3.05,35.35 5.6,35.35 19.55,35.35 24.2,35.35 29.3,35.35 35.4,35.35 40,35.35 45,35.35 50.099,35.35 55,35.35 60,35.35 62.2,35.35 64.35,35.35
  other v2: 31.05,16.2 32.25,16.2 33.45,16.2 31.05,17.4 34.65,17.4 31.05,18.6 34.65,18.6 32.25,19.8 33.45,19.8 11.9,30.4 13.5,30.4 12.7,32.05 11.9,33.7 13.5,33.7
  other v4: 40.7,10.1
MISO: K_SX12xx.8 R13.5 | length 21.7
  Top Layer w0.2: v1(7.8,9.55) 8.9,10.65 13.7,10.65 14.1,10.25 R13.5
  MidLayer2 w0.2: K_SX12xx.8 2.41,14.09 3.55,12.95 5.75,12.95 7.8,10.9 v1(7.8,9.55)
MISO_SX: R13.4 U1.17 | length 13.2
  Top Layer w0.2: R13.4 28.5,10.25 32.2,13.95 U1.17
MOSI: K_SX12xx.3 R13.6 | length 23.8
  Top Layer w0.2: K_SX12xx.3 3.9,8.09 3.9,5.773 4.123,5.55 6.379,5.55 6.939,6.111 6.939,7.822 9.317,10.2 13.4,10.2 13.85,9.75 R13.6
MOSI_SX: R13.3 U1.18 | length 14.1
  Top Layer w0.2: R13.3 28.65,9.75 32.85,13.95 U1.18
NetANT_HF_1: ANT_HF.1 C20.2 L6.2 | length 7.1
  Top Layer w0.3: L6.2 C20.2 57.5,6 ccw(c58.2,6) 58.2,5.3 ANT_HF.1
NetANT_LF_1: ANT_LF.1 C41.2 L13.2 | length 7
  Top Layer w0.3: L13.2 C41.2 57.5,30 cw(c58.2,30) 58.2,30.7 ANT_LF.1
NetC1_2: C1.2 F1.2 Q1.4 | length 2.3
  Top Layer w0.5: Q1.4 C1.2 F1.2
NetC2_1: C2.1 Q1.3 | length 1.3
  Top Layer w0.3: Q1.3 C2.1
NetC2_2: C2.2 U1.5 | length 2.3
  Top Layer w0.3: C2.2 30.738,22.35 31.337,21.75 31.75,21.75 32.2,21.3 U1.5
NetC4_2: C4.2 U1.2 | length 1.6
  Top Layer w0.3: U1.2 C4.2
NetC5_2: C5.2 U1.4 | length 2.1
  Top Layer w0.3: C5.2@31.8,22.581 31.809,22.581 32.85,21.54 U1.4
NetC7_2: C7.2 C8.2 C35.2 L1.1 L2.2 U1.25 | length 9.2
  Top Layer w0.4: U1.25@35.6,18 U1.25 38.15,18 ; C7.2 L1.1 C35.2 38.15,18 ; L2.2 39.375,15.125 39.375,17.581 38.956,18 38.15,18
NetC9_1: C9.1 L3.1 | length 1.1
  Top Layer w0.3: C9.1 L3.1
NetC9_2: C9.2 C10.2 L2.1 U1.22 | length 4.5
  Top Layer w0.3: U1.22@35.95,16.05 35.95,15.458 37.25,14.158 C10.2 C9.2 L2.1
NetC11_2: C11.2 C12.2 L3.2 L4.1 | length 3
  Top Layer w0.3: L3.2 C11.2 L4.1 C12.2
NetC12_1: C12.1 C13.2 L4.2 U2.1 | length 5.8
  Top Layer w0.3: C12.1 L4.2 C13.2 45.65,13.411 47.661,11.4 U2.1
NetC14_2: C14.2 L5.1 U1.21 | length 2.9
  Top Layer w0.3: U1.21 34.8,13.65 C14.2 L5.1
NetC15_2: C15.2 C16.2 L5.2 | length 2.8
  Top Layer w0.3: L5.2 35.1,10.915 ccw(c35.915,10.915) 35.915,10.1 C15.2 C16.2
NetC16_1: C16.1 U4.5 | length 1.4
  Top Layer w0.3: C16.1 U4.5
NetC17_1: C17.1 U2.3 | length 3.2
  Top Layer w0.3: C17.1 U2.3
NetC17_2: C17.2 U4.2 | length 1.7
  Top Layer w0.3: U4.2 C17.2
NetC18_1: C18.1 C19.2 L6.1 | length 6.9
  Top Layer w0.3: C18.1 ccw(c54.726,13.526) 54.726,9.6 C19.2 L6.1
NetC18_2: C18.2 U2.5 | length 1.1
  Top Layer w0.3: U2.5 C18.2
NetC22_1: C22.1 R1.2 R2.1 U2.4 | length 4
  Top Layer w0.3: R1.2 R2.1 C22.1 U2.4
NetC28_1: C28.1 L8.1 | length 1
  Top Layer w0.3: C28.1 L8.1
NetC28_2: C28.2 C29.2 L1.2 L7.2 | length 3.3
  Top Layer w0.3: L7.2 L1.2 C29.2 C28.2
NetC30_2: C30.2 C31.2 L8.2 L9.1 | length 3.1
  Top Layer w0.3: L8.2 C30.2 L9.1 C31.2
NetC31_1: C31.1 C32.2 C33.2 L9.2 L10.1 | length 4.2
  Top Layer w0.3: C31.1 L9.2 C32.2 L10.1 C33.2
NetC33_1: C33.1 C34.2 L10.2 U5.3 | length 4.1
  Top Layer w0.3: C33.1 L10.2 C34.2 48.65,23.582 cw(c49.297,23.582) 48.839,24.039 cw(c49.3,23.579) 49.3,24.23 U5.3
NetC36_1: C36.1 R16.2 | length 1
  Top Layer w0.3: C36.1 R16.2
NetC36_2: C36.2 C37.2 L12.2 | length 2
  Top Layer w0.3: L12.2 C37.2 C36.2
NetC38_1: C38.1 U5.1 | length 1.1
  Top Layer w0.3: U5.1@49.5,25.53 C38.1
NetC38_2: C38.2 R19.1 R20.1 | length 2.1
  Top Layer w0.3: R20.1 R19.1 C38.2
NetC39_1: C39.1 C40.2 L13.1 | length 5.3
  Top Layer w0.3: C39.1 54.853,25.934 cw(c56.1,24.687) 56.1,26.45 C40.2 L13.1
NetC39_2: C39.2 U5.5 | length 1.2
  Top Layer w0.3: U5.5 C39.2
NetC42_1: C42.1 R15.1 U5.4 | length 3.4
  Top Layer w0.3: R15.1 C42.1 51.58,24.2 U5.4
NetF1_1: F1.1 R23.2 R24.1 | length 2.3
  Top Layer w0.5: R23.2 29.45,28.305 ; R24.1 29.45,28.305 ; F1.1 29.455,28.3 29.45,28.305
NetL7_1: L7.1 U1.27 | length 1.4
  Top Layer w0.3: U1.27 36.5,19.3 36.95,19.75 L7.1
NetL11_2: L11.2 L12.1 U1.1 | length 3.1
  Top Layer w0.3: U1.1 34.8,21.55 35.175,21.925 L11.2 L12.1
NetR6_1: R6.1 R8.2 U3.1 | length 2.5
  Top Layer w0.2: R8.2 R6.1 8.555,33.955 U3.1
NetR7_1: R7.1 R9.2 U3.2 | length 2.4
  Top Layer w0.2: R7.1 R9.2 8.615,32.685 U3.2
NetR10_2: R10.2 U3.7 | length 1.4
  Top Layer w0.2: U3.7 R10.2@16.9,32.685
NetR16_1: R16.1 R17.1 R21.2 U6.4 | length 2.6
  Top Layer w0.3: R17.1 R16.1 38.77,28.1 R21.2
NetR18_1: R18.1 R19.2 R22.1 U6.12 | length 3.1
  Top Layer w0.3: U6.12 45.61,25.53 ccw(c45.61,25.94) 45.9,25.65 ccw(c45.055,26.495) 46.25,26.495 R19.2 ; R19.2@46.25,26.523 R18.1
NetR21_1: R21.1 R22.2 | length 6.3
  Top Layer w0.3: R21.1@38.87,26.75 R22.2@45.15,26.75
NRESET: K_SX12xx.10 R14.2 | length 27.5
  Top Layer w0.2: K_SX12xx.10 2.29,16.76 2.29,17.666 1.4,18.556 1.4,22.57 2.152,23.322 6.178,23.322 8.75,20.75 14.3,20.75 15.1,21.55 18.95,21.55 19.55,20.95 R14.2
NRESET_SX: R14.1 U1.7 | length 9.5
  Top Layer w0.2: R14.1 22.175,20.475 29.837,20.475 30.162,20.8 U1.7@30.9,20.8
NSS: K_SX12xx.7 R13.7 | length 20.9
  Top Layer w0.2: K_SX12xx.7 6.18,14.22 7.18,13.22 15.05,13.22 15.53,13.7 v1(15.6,13.7) ; v1(15.6,9.2) 15.65,9.25 R13.7
  MidLayer2 w0.2: v1(15.6,9.2) v1(15.6,13.7)
NSS_SX: R13.2 U1.19 | length 14.9
  Top Layer w0.2: R13.2 28.785,9.25 33.5,13.965 U1.19
RXTX: K_SX12xx.13 R13.8 | length 26.8
  Top Layer w0.2: v1(11.6,8.4) 11.65,8.4 11.95,8.1 15.5,8.1 16.15,8.75 R13.8
  MidLayer2 w0.2: K_SX12xx.13 4.95,21.75 8.674,18.026 10.574,18.026 11.1,17.5 11.1,8.9 v1(11.6,8.4)
RXTX_RF_SX: R1.1 R13.1 RXTX_RFMOD.1 U1.20 | length 34.3
  Top Layer w0.2: R13.1 31.55,8.75 ; U1.20 34.15,13.95 31.55,11.35 RXTX_RFMOD.1 31.55,8.75 ; v1(36.85,6.9) 34.9,6.9 33.05,8.75 31.55,8.75 ; v1(46.895,7.1) R1.1
  MidLayer2 w0.2: v1(36.85,6.9) 46.696,6.9 v1(46.895,7.1)
SCK: K_SX12xx.1 R5.7 | length 19.8
  Top Layer w0.2: K_SX12xx.1 4.95,7.55 8.8,11.4 8.8,12.071 9.429,12.7 15.65,12.7 17,14.05 R5.7
SCK_SX: R5.2 U1.16 | length 12.4
  Top Layer w0.2: R5.2 23.35,14.05 25.05,12.35 29.95,12.35 31.55,13.95 U1.16
SCL: K_SX12xx.23 R11.1 U3.6 | length 28.5
  Top Layer w0.2: v1(14.4,27.3) 14.45,27.35 14.45,30.7 15.165,31.415 U3.6 16.165,31.415 v1(16.75,32) ; v1(19.051,32.215) R11.1
  MidLayer2 w0.2: K_SX12xx.23 14.4,10.97 v1(14.4,27.3) ; v1(16.75,32) 17.15,31.6 18.436,31.6 v1(19.051,32.215)
SDA: K_SX12xx.21 R12.1 U3.5 | length 32.5
  Top Layer w0.2: v1(14.95,26.55) 15.05,26.55 15.05,28.8 v1(15.5,29.25) U3.5 ; v1(20.101,32.215) R12.1
  MidLayer2 w0.2: K_SX12xx.21 14.95,8.98 v1(14.95,26.55) ; v1(15.5,29.25) 19.15,29.25 20.101,30.201 v1(20.101,32.215)
SX_GPIO0: K_SX12xx.25 R23.1 | length 31.2
  Top Layer w0.25: v1(13.602,23) v1(16.45,23) ; v1(25.45,28.9) 26.626,27.724 R23.1
  MidLayer2 w0.25: K_SX12xx.25 11.5,12.75 11.5,22.358 12.142,23 v1(13.602,23) ; v1(16.45,23) 22.35,28.9 v1(25.45,28.9)
SX_GPIO1: K_SX12xx.26
SX_GPIO2: K_SX12xx.27
SX_GPIO3: K_SX12xx.28
SX_GPIO4: K_SX12xx.29
SX_GPIO5: K_SX12xx.30
SX_GPIO6: K_SX12xx.31
SX_GPIO7: K_SX12xx.33
VDD_ANA: C6.2 C24.2 C43.2 C45.2 K_SX12xx.22 R6.2 R7.2 R11.2 R12.2 R24.2 U2.6 U3.3 U3.8 U5.6 | length 140.1
  Top Layer w0.3: 6.051,31.8 6.051,31.399 6.485,30.965 9.051,30.965 9.501,31.415 U3.3
  Top Layer w0.4: R7.2 6.051,31.8 v1(6.051,33.915) 7.385,33.915 R6.2 ; U3.8 C6.2@16.89,33.955 ; C6.2@17.09,33.955 C6.2@16.89,33.955 ; R11.2 R11.2@19.001,33.965 ; R12.2@20.051,33.972 19.009,33.972 R11.2@19.001,33.965 ; U2.6 C45.2 v1(50.45,12.4) ; U5.6 C43.2@51.55,26.57 ; C43.2 v1(52.15,26.572) ; C6.2@16.89,33.955 C6.2 v3(17.801,33.965) R11.2@19.001,33.965
  Top Layer w0.5: v3(27.25,32.55) 27.25,29.357 27.857,28.749 R24.2
  Top Layer w0.8: v3(3.85,4.1) 5.6,4.1 7.25,2.45 C24.2 ; K_SX12xx.22 K_SX12xx.22@10.049,6.581
  Top Layer w1: C24.2 K_SX12xx.22@10.049,6.581
  MidLayer2 w0.5: v3(27.25,32.55) 27.25,33.949
  MidLayer2 w0.6: v3(3.85,4.1) 3.8,4.15 2.2,4.15 0.6,5.75 0.6,30.35 4.165,33.915 v1(6.051,33.915) 8.633,33.915 9.368,34.65 15.316,34.65 16.001,33.965 v3(17.801,33.965) ; v3@17.801,33.949 27.25,33.949 49.451,33.949 53.25,30.15 53.25,26.572 ; v1(50.45,12.4) 51.661,12.4 53.25,13.989 53.25,26.572 ; v1(52.15,26.572) 53.25,26.572
VDD_FEM: C25.1 K_SX12xx.34 | length 4.1
  Top Layer w0.6: K_SX12xx.34 K_SX12xx.34@10.049,21.859
  Top Layer w1: K_SX12xx.34@10.049,21.859 C25.1
VDD_RF: C23.2 K_SX12xx.2 R3.2 VDD_RFS.1 | length 24.7
  Top Layer w1: C23.2@2.399,2.75 C23.2 2.399,1.451 3.05,0.8 18.7,0.8 20.4,2.5 VDD_RFS.1 VDD_RFS.1@20.8,2.85 ; C23.2@2.41,2.761 K_SX12xx.2
VDD_RFS: C3.2 C21.2 C26.2 C27.2 C44.2 R3.1 U1.3 U1.14 U1.24 VDD_RFS.2 | length 89.1
  Top Layer w0.4: v3(32.475,25.35) 32.475,23.18 33.105,22.55 C3.2 33.15,22.405 33.5,22.056 U1.3 ; U1.24@35.55,17.35 U1.24 C26.2@37.05,17.35
  Top Layer w0.6: v3(28.6,14) C21.2 29.55,16.05 U1.14 U1.14@30,16.05
  Top Layer w1: R3.1 18,3 19.05,4.05 21.6,4.05 22.99,2.66 VDD_RFS.2 v3(26.15,2.5)
  MidLayer2 w0.8: 27.05,2.5 27.9,2.5 29.05,3.65 29.05,10.4 33.8,15.15 35.877,15.15 v3(37.428,16.701) ; v3(28.6,14) 19.55,14 19.55,23.45 23.9,27.8 31.195,27.8 32.475,26.52 v3(32.475,25.35)
  MidLayer2 w1: 19.55,14 19.55,11.1 26.15,4.5 v3(26.15,2.5) 27.05,2.5
pads on no net: K_SX12xx.15 R5.1 R5.8 U1.6 U1.28

## Polygon pours and split planes (outlines as drawn)
GND on Bottom Layer "GND Bottom" (solid, remove dead copper, pour order 6): 0.3,0.3 64.636,0.3 64.7,0.3 64.7,35.7 0.3,35.7
GND on Top Layer "GND Top" (solid, remove dead copper, pour order 4): 0.3,0.3 64.7,0.3 64.7,35.7 0.3,35.7
GND on MidLayer1 "GND Midlayer1" (solid, remove dead copper, pour order 5): 0.3,0.3 64.636,0.3 64.7,0.3 64.7,35.7 0.3,35.7

## Other copper
Top Layer:
  region net VDD_RFS: 36.89,17.625 36.89,15.815 37.64,15.815 37.638,17.627
  region net GND: 35.171,15.331 35.171,15.388 34.778,15.781 35.049,16.053 35.049,16.081 35.051,16.081 35.501,15.631
  pour cut-out: 35.69,10.575 35.67,10.575 35.575,10.67 35.575,10.74 35.535,10.7 35.53,10.7 35.53,10.579 35.589,10.52 35.69,10.52
  pour cut-out: 31,21.503 30.95,21.503 30.95,21.764 31.024,21.69
  region net GND: 30.26,15.669 30.608,15.969 30.868,15.717 30.883,15.702 30.833,15.652 30.833,14.427 30.274,14.427 30.26,14.412
  region net GND: 45.075,14.58 46.17,14.58 46.155,14.595 46.155,14.906 45.729,14.906 45.705,14.93 45.715,14.94 45.715,15.71 45.115,15.71 45.075,15.67
  region net GND: 42.039,14.581 43.014,14.581 43.014,15.726 42.734,15.726 42.694,15.686 42.694,14.906 42.024,14.906 42.024,14.596
  region net GND: 24.3,0.3 26.1,0.3 26.1,0.6 24.3,0.6
  region net GND: 57.975,29.075 57.975,30.05 58.491,30.05 58.5,30.059 58.5,29.051 57.976,29.051 57.975,29.05
  region net GND: 57.975,27.01 57.975,25.785 58.3,25.781 58.3,27.01
  region net GND: 57.851,30.179 57.85,30.059 57.926,30 58.048,30 58.05,30.002 58.05,30.179
  region net GND: 57.976,8.906 57.976,10.25 58.45,10.25 58.45,8.906
  region net GND: 57.975,7.025 57.975,6.025 57.849,6.025 57.824,6 57.824,5.889 58.478,5.889 58.491,5.876 58.55,5.935 58.55,7.026
  pour cut-out: 57.85,30.059 57.851,30.219 57.85,30.22 57.839,30.22 57.839,30.071
  region net GND: 34.7,24.15 34.7,23.05 34.692,23.058 33.95,23.058 33.95,24.265
  region net GND: 35.65,23.45 35.65,22.186 36.114,22.186 36.128,22.2 35.989,22.339 35.989,23.45
  region net GND: 37.675,22.696 37.673,22.695 37.673,21.338 36.6,21.338 36.529,21.338 36.532,21.341 36.532,21.588 37.35,21.588 37.355,21.593 37.355,22.696
  region net GND: 49.186,22.57 48.075,22.57 48.075,21.43 48.559,21.43 48.559,21.932 48.521,21.97 49.186,21.97
  region net GND: 41.67,22.575 42.92,22.575 42.92,21.2 42.487,21.2 42.487,22.016 41.67,22.016
  region net GND: 35.617,28.575 36.8,28.575 36.8,29.636 36.417,29.636 36.417,28.821 36.408,28.812 35.617,28.812
  region net GND: 37.75,29.335 37.75,28.625 37.751,28.624 38,28.624 38,29.335
  region net GND: 35.65,25.336 35.65,26.525 35.95,26.525 35.975,26.55 36,26.525 36,25.355
  region net GND: 45.55,28.1 47.9,28.1 47.925,28.125 47.925,28.472 45.55,28.472
  region net GND: 39.85,24.125 39.85,23.657 43.75,23.657 43.75,24.125
  region net GND: 16.319,35.7 17.6,35.7 17.6,35.4 17.65,35.35 17.615,35.315 16.307,35.315
  region net GND: 45.775,27.125 45.775,28.85 45.55,28.85 45.55,27.15
  region net GND: 35.575,12.65 35.575,14 35.857,14 35.9,13.957 35.9,12.65
  region net GND: 36.775,14.205 36.775,12.525 36.75,12.5 36.5,12.5 36.5,14.2
  region net GND: 37.875,13.625 36.65,13.625 36.65,13.305 36.651,13.304 37.875,13.304
  region net GND: 39.975,16.7 39.975,15.59 40.299,15.59 40.299,16.7
  pour cut-out: 46.125,13.7 46.125,13.275 46.075,13.275 46.05,13.3 46.05,13.7
  pour cut-out: 38.775,10.575 39.246,10.575 39.296,10.525 39.245,10.474 38.775,10.474
  pour cut-out: 38.775,9.625 39.245,9.625 39.245,9.64 39.217,9.668 38.76,9.668
  region net GND: 36.67,9.625 35.625,9.625 35.61,9.61 35.61,9.297 36.669,9.297 36.67,9.296
  region net GND: 38.1,17.625 38.1,15.819 38.913,15.819 39.011,15.917 39.011,17.45 38.836,17.625 38.725,17.625
  pour cut-out: 36.675,16.55 36.675,16.7 36.499,16.905 36.375,16.95 36.375,17.05 36.7,17.05 36.7,16.611 36.698,16.609
  region net GND: 34.8,20.2 34.8,20.25 35.2,20.65 35.478,20.372 35.478,20.336 35.092,19.95
  pour cut-out: 37.675,22.658 37.675,22.233 38.625,22.233 38.625,22.65 37.683,22.65
  pour cut-out: 42.975,10.575 42.65,10.575 42.65,10.564 ccw(c42.684,10.564) 42.66,10.54 ccw(c42.998,10.878) 42.998,10.4 43.06,10.4
  pour cut-out: 42.975,9.625 42.58,9.625 42.57,9.635 42.608,9.672 cw(c42.699,9.581) 42.699,9.71 43.017,9.71
Bottom Layer:
  region net GND: 30.625,20.2 30.625,15.75 35.075,15.75 35.075,20.2

## Silkscreen, mask and mechanical layers (free items; w line width, h text height)
Top Overlay:
  text "1" at 36.254,21.35 h0.8
  text "SX1276RF1IAS" at 34.35,1.1 h1.5
Bottom Overlay:
  text "PCB_E266V02A 1813" at 24.5,10.55 h1 r270
Mechanical 2:
  lines w0.05: 0,0 65,0 65,36 0,36 0,0
  lines w0.1: 39.7,9.55 39.7,10.65 41.75,10.65 41.75,9.55 39.7,9.55
Mechanical 3:
  lines w0.05: 4.15,6.6 5.75,6.6 ; 4.95,5.8 4.95,7.4 ; 0,0 0,36 65,36 65,0 0,0
  text "Origin(0;0)" at -10.35,-1.5 h1
Mechanical 14:
  the board outline again, w0.05
Mechanical 15:
  lines w0.05: 54.5,11 65,11 ; 54.5,25 65,25
  lines w0.1: 0,18 65.5,18 ; 39.073,9.756 40.29,9.756 40.29,10.456 39.073,10.456 ; 39.073,8.406 42.74,8.406 42.74,11.806 39.073,11.806 39.073,8.406 ; 41.09,9.756 41.09,10.456 42.74,10.456 42.74,9.756 41.09,9.756

## Dimensions
0,0 to 65,0 on Mechanical 3
0,-0.05 to 4.95,6.6 on Mechanical 3
0,0 to 4.95,6.6 on Mechanical 3
0,0 to 0,36 on Mechanical 3

## Text inside footprints (layer, text, board x,y; h text height)
K_SX12xx: Top Overlay "22" at 9.65,4.7 h0.8 r270; Top Overlay "21" at 12.2,4.7 h0.8 r270; Top Overlay "1" at 4.55,4.6 h0.8 r270; Top Overlay "2" at 2.05,4.7 h0.8 r270
Q1: Top Overlay "1" at 27,26.8 h0.6
Shield: Top Overlay "1" at 15.8,4.8 h1